# Altium PCB RearPlate.PcbDoc
Units mm, origin at the board's own origin, x right, y up, seen from the top; angles counter-clockwise.
Board outline 84 x 28.5 mm, 2 copper layers (Top Layer, Bottom Layer), stack 0.971 mm thick; 1 components, 1 nets, 7 pads, 0 vias.
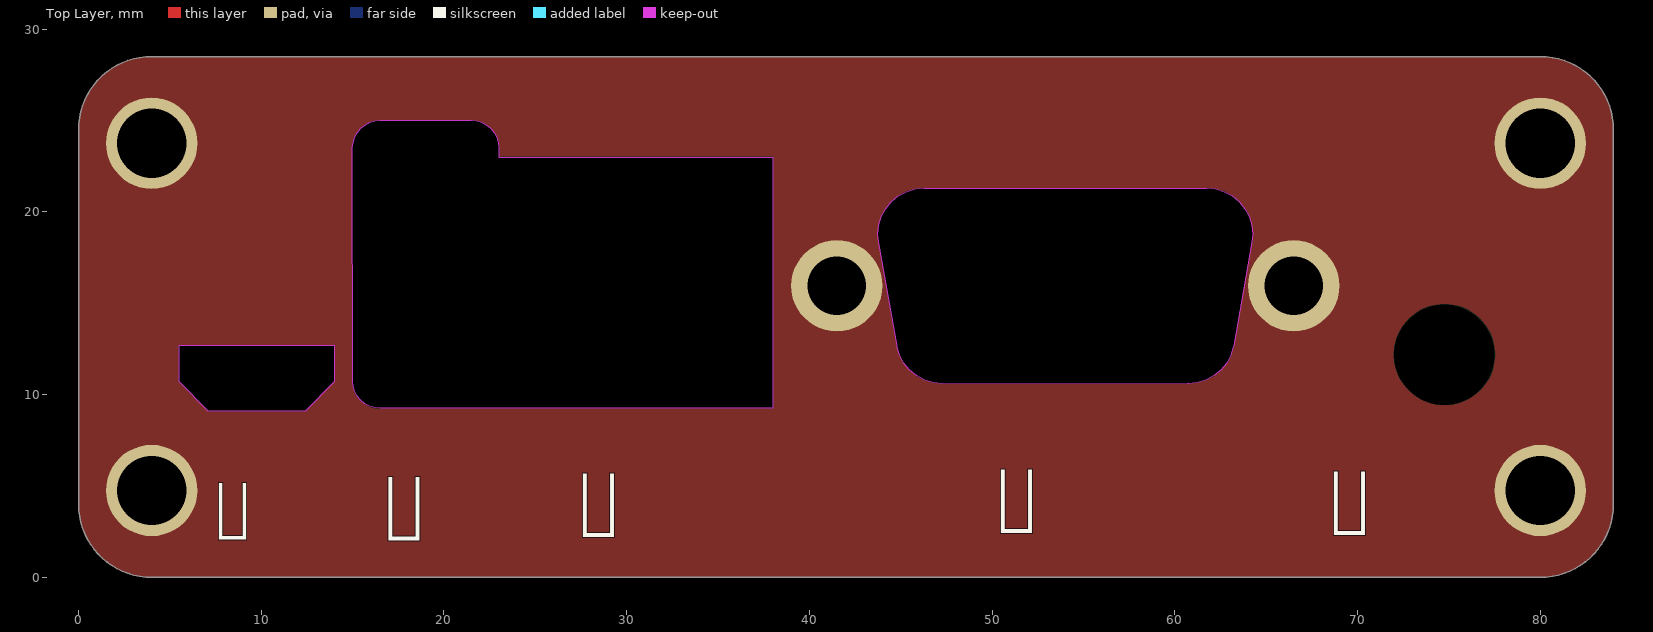
[diagram p0: Top Layer view]
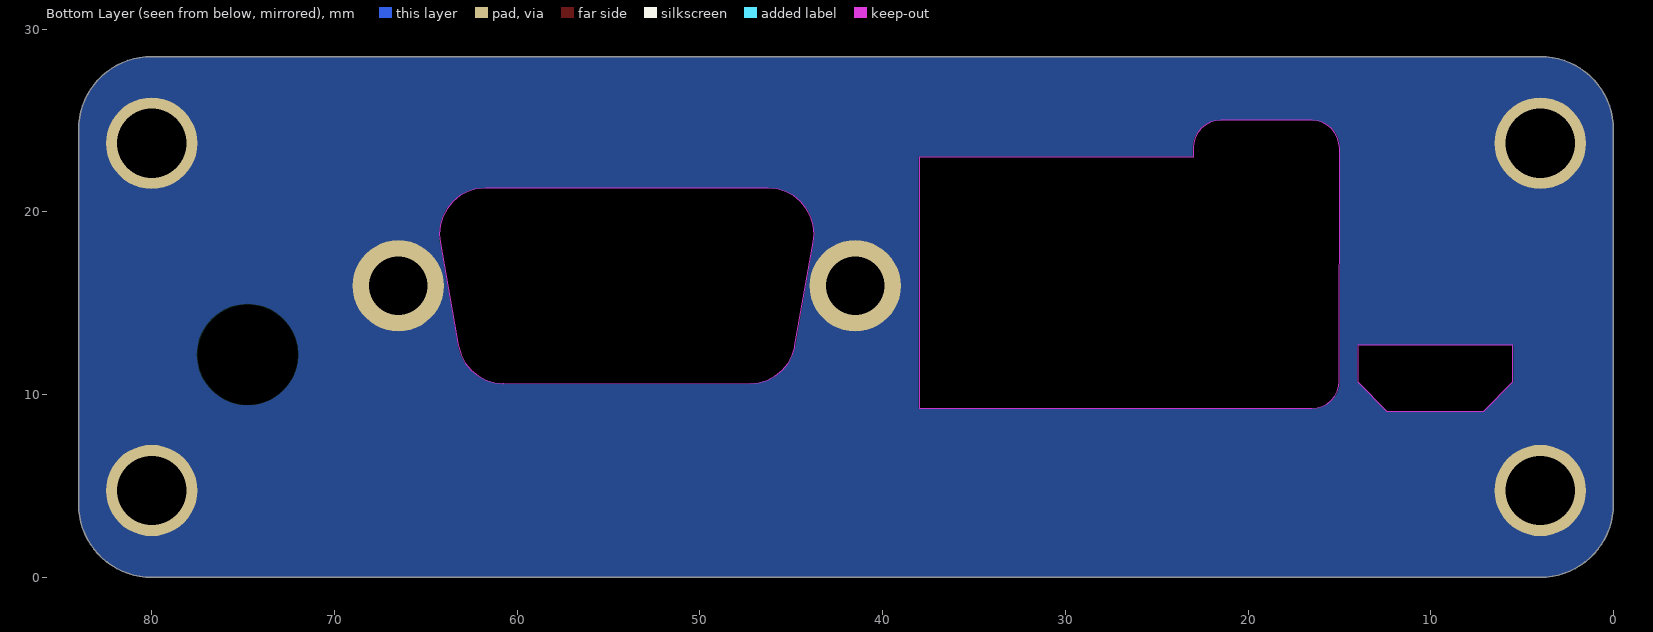
[diagram p1: Bottom Layer view, seen from below]

## Layer stack, top to bottom
Top Solder: solder mask 0.0254, Solder Resist, Dk 3.5
Top Layer: signal copper 0.0356
Dielectric 1: core 0.9, FR-4, Dk 4.6
Bottom Layer: signal copper 0.0356
Bottom Solder: solder mask 0.0254, Solder Resist, Dk 3.5

## Board outline
4,0 cw(c4,4) 0,4 0,24.5 cw(c4,24.5) 4,28.5 8.75,28.5 75.25,28.5 80,28.5 cw(c80,24.5) 84,24.5 84,4 cw(c80,4) 80,0 75.25,0 8.75,0
cut-out: 14,10.7 12.4,9.1 7.1,9.1 5.5,10.7 5.5,12.7 14,12.7
cut-out: 21.794,24.978 22.077,24.893 22.337,24.753 22.566,24.566 22.753,24.337 22.893,24.077 22.978,23.794 23.007,23.507 23,23.5 23,23 38,23 38,9.25 16.5,9.243 16.206,9.272 15.923,9.357 15.663,9.497 15.434,9.684 15.247,9.913 15.107,10.173 15.022,10.456 14.993,10.743 15,10.75 14.993,23.5 15.022,23.794 15.107,24.077 15.247,24.337 15.434,24.566 15.663,24.753 15.923,24.893 16.206,24.978 16.493,25.007 16.5,25 21.5,25.007
cut-out: 62.222,21.254 62.695,21.11 63.131,20.877 63.513,20.563 63.827,20.181 64.06,19.745 64.204,19.272 64.252,18.78 64.21,18.35 64.202,18.344 63.209,12.683 63.204,12.628 63.06,12.155 62.827,11.719 62.513,11.337 62.131,11.023 61.695,10.79 61.222,10.646 60.742,10.599 60.73,10.61 47.27,10.598 46.778,10.646 46.305,10.79 45.869,11.023 45.487,11.337 45.173,11.719 44.94,12.155 44.817,12.559 44.798,12.684 43.791,18.343 43.748,18.78 43.796,19.272 43.94,19.745 44.173,20.181 44.487,20.563 44.869,20.877 45.305,21.11 45.778,21.254 46.258,21.301 46.27,21.29 61.73,21.302

## Design rules (kind name [scope] priority, off if disabled: settings)
AssemblyTestPointUsage AssemblyTestPointUsage_1 [All] p2:
AssemblyTestpoint AssemblyTestpoint_1 [All] p2: testpointundercomponent=TRUE minsize=1.016 maxsize=2.54 preferedsize=1.524 minholesize=0 maxholesize=1.016 preferedholesize=0.813 testpointgrid=0.025 usegrid=TRUE gridtolerance=0 allowsidetop=TRUE allowsidebottom=TRUE
Clearance [All] p1: gap=0.254 ignorepadtopadclearanceinfootprint=FALSE
Clearance Clearance_1 [All] p2: gap=0.01 ignorepadtopadclearanceinfootprint=FALSE
ComponentClearance ComponentClearance_1 [All] p2: gap=0.254 collisioncheckmode=3 verticalgap=0.254 showdistances=FALSE
DiffPairsRouting DiffPairsRouting_1 [All] p2: maxlimit=0.254 minlimit=0.254 mostfreqgap=0.254 toplayer_minwidth=0.381 toplayer_maxwidth=0.381 toplayer_prefwidth=0.381 bottomlayer_minwidth=0.381 bottomlayer_maxwidth=0.381 bottomlayer_prefwidth=0.381 maxuncoupledlength=12.7
FabricationTestPointUsage FabricationTestPointUsage_1 [All] p2: valid=0 allowmultiple=FALSE
FabricationTestpoint FabricationTestpoint_1 [All] p2: side=3 testpointundercomponent=TRUE minsize=1.016 maxsize=2.54 preferedsize=1.524 minholesize=0 maxholesize=1.016 preferedholesize=0.813 testpointgrid=0.025 allowsidetop=TRUE allowsidebottom=TRUE usegrid=TRUE gridtolerance=0
FanoutControl Fanout_LCC [IsLCC] p1: bgadir=Out bgaviamode=Centered fanoutstyle=Auto fanoutdirection=Alternating viagrid=0.025 // Fanout_LCC (Default Rule)
FanoutControl Fanout_BGA [IsBGA] p2: bgadir=Out bgaviamode=Centered fanoutstyle=Auto fanoutdirection=Alternating viagrid=0.025 // Fanout_BGA (Default Rule)
FanoutControl Fanout_Default [All] p4: bgadir=Out bgaviamode=Centered fanoutstyle=Auto fanoutdirection=Alternating viagrid=0.025 // Fanout_Default (Default Rule)
FanoutControl Fanout_Small [(CompPinCount < 5)] p5: bgadir=Out bgaviamode=Centered fanoutstyle=Auto fanoutdirection=OutThenIn viagrid=0.025 // Fanout_Small (Default Rule)
FanoutControl Fanout_BGA_1 [IsBGA] p6: bgadir=Out bgaviamode=Centered fanoutstyle=Auto fanoutdirection=Alternating viagrid=0.025 // Fanout_BGA (Default Rule)
FanoutControl Fanout_LCC_1 [IsLCC] p7: bgadir=Out bgaviamode=Centered fanoutstyle=Auto fanoutdirection=Alternating viagrid=0.025 // Fanout_LCC (Default Rule)
FanoutControl Fanout_SOIC_1 [IsSOIC] p8: bgadir=Out bgaviamode=Centered fanoutstyle=Auto fanoutdirection=Alternating viagrid=0.025 // Fanout_SOIC (Default Rule)
FanoutControl Fanout_Small_1 [(CompPinCount < 5)] p9: bgadir=Out bgaviamode=Centered fanoutstyle=Auto fanoutdirection=OutThenIn viagrid=0.025 // Fanout_Small (Default Rule)
FanoutControl Fanout_Default_1 [All] p10: bgadir=Out bgaviamode=Centered fanoutstyle=Auto fanoutdirection=Alternating viagrid=0.025 // Fanout_Default (Default Rule)
Height Height_1 [All] p2: minheight=0 maxheight=25.4 prefheight=12.7
HoleSize HoleSize_1 [All] p2: absolutevalues=TRUE maxlimit=2.54 minlimit=0.025 maxpercent=80.000 minpercent=20.000
HoleToHoleClearance HoleToHoleClearance_1 [All] p2: gap=0.254 allowstackedmicrovias=TRUE
LayerPairs LayerPairs_1 [All] p2: enforce=TRUE
MinimumSolderMaskSliver MinimumSolderMaskSliver_1 [All] p2: minsoldermaskwidth=0.254
NetAntennae NetAntennae_1 [All] p2: netantennaetolerance=0
PasteMaskExpansion PasteMaskExpansion_1 [All] p2: expansion=0
PlaneClearance PlaneClearance_1 [All] p2: clearance=0.508
PlaneConnect PlaneConnect_1 [All] p2: planeconnectstyle=Relief reliefexpansion=0.508 reliefentries=4 reliefconductorwidth=0.254 reliefairgap=0.254
PolygonConnect [All] p1: connectstyle=Relief reliefconductorwidth=0.254 reliefentries=4 polygonreliefangle="90 Angle" airgapwidth=0.254
PolygonConnect PolygonConnect_1 [All] p2: connectstyle=Direct reliefconductorwidth=0.254 reliefentries=4 polygonreliefangle="90 Angle" airgapwidth=0.254
RoutingCorners RoutingCorners_1 [All] p2: cornerstyle=45-Degree minsetback=2.54 maxsetback=2.54
RoutingLayers RoutingLayers_1 [All] p2: top layer_v5=TRUE bottom layer_v5=TRUE
RoutingPriority RoutingPriority_1 [All] p2: routingpriority=0
RoutingTopology RoutingTopology_1 [All] p2: topology=Shortest
RoutingVias [All] p1: holewidth=0.711 width=1.27 viastyle="Through Hole" minholewidth=0.711 minwidth=1.27 maxholewidth=0.711 maxwidth=1.27
RoutingVias RoutingVias_1 [All] p2: holewidth=0.711 width=1.27 viastyle="Through Hole" minholewidth=0.711 minwidth=1.27 maxholewidth=0.711 maxwidth=1.27
ShortCircuit ShortCircuit_1 [All] p2: allowed=FALSE
SilkToBoardRegionClearance SilkToBoardRegionClearance_1 [All] p2:
SilkToSilkClearance SilkToSilkClearance_1 [All] p2: silktosilkclearance=0.254
SilkToSolderMaskClearance SilkToSolderMaskClearance_1 [IsPad] p2: minsilkscreentomaskgap=0.254 clearancetoexposedcopper=TRUE
SolderMaskExpansion [All] p1: expansion=0.102 istentingtop=FALSE
SolderMaskExpansion SolderMaskExpansion_1 [All] p2: expansion=0.102 istentingtop=FALSE
UnRoutedNet UnRoutedNet_1 [All] p2:
UnpouredPolygon UnpouredPolygon_1 [All] p2:
Width [All] p1: maxlimit=0.254 minlimit=0.254 preferedwidth=0.254
Width Width_1 [All] p2: maxlimit=0.254 minlimit=0.254 preferedwidth=0.254
26 further rules are at their usual default settings.

## Components (designator, comment, footprint, x,y, rotation, side; value= is the part's Value field where it differs from the comment)
 "Comment" PCB-rupm4665jh793f2ljsg0-1 54,15.95 r0 top

## Footprints (in the part's own frame and the unit in brackets; to place one, negate y for a bottom-side part, rotate by r counter-clockwise, add the part's x,y. Pads: shape width x height; smd on the part's side, far side on the other; paste and mask are expansions set on the pad)
PCB-rupm4665jh793f2ljsg0-1 [mm]
  round 5 hole 3.2: 1(-12.5,0) 2(12.5,0)

## Part data
: library part "DE panelmount-1"

## Free pads (board coordinates)
  round 1.524 hole 5.5 unplated: 0(74.75,12.19)
  round 5 hole 3.8: 1(4,23.75) 1(80,23.75) 2(4,4.75) 2(80,4.75)

## Nets (pads, with @x,y where several pads share a name; then routed paths per layer and width w, separated by ;. In a path a pad name is that pad's centre, name@x,y a point inside that pad or via, vN(x,y) a via of type N, cw(c..) or ccw(c..) an arc to the next point about the centre after c; other vN are vias at no path point)
GND: pad.1 pad.2 .1 .2

## Polygon pours and split planes (outlines as drawn)
GND on Top Layer "Mechanical 3-No Net" (solid, pour order 5): 4,0 cw(c4,4) 0,4 0,24.5 cw(c4,24.5) 4,28.5 8.75,28.5 75.25,28.5 80,28.5 cw(c80,24.5) 84,24.5 84,4 cw(c80,4) 80,0 75.25,0 8.75,0
GND on Bottom Layer "Mechanical 3-No Net" (solid, pour order 4): 4,0 cw(c4,4) 0,4 0,24.5 cw(c4,24.5) 4,28.5 8.75,28.5 75.25,28.5 80,28.5 cw(c80,24.5) 84,24.5 84,4 cw(c80,4) 80,0 75.25,0 8.75,0
GND on Bottom Solder "Mechanical 3-No Net" (solid, pour order 6): 4,0 cw(c4,4) 0,4 0,24.5 cw(c4,24.5) 4,28.5 8.75,28.5 75.25,28.5 80,28.5 cw(c80,24.5) 84,24.5 84,4 cw(c80,4) 80,0 75.25,0 8.75,0

## Silkscreen, mask and mechanical layers (free items; w line width, h text height)
Top Overlay:
  text "" at 68.5,0.8 h8
  text "" at 7.5,0.75 h7
  text "" at 27.4,0.7 h8
  text "" at 16.75,0.5 h8
Mechanical 3:
  lines w0.254: 0,4 ccw(c4,4) 4,0 8.75,0 75.25,0 80,0 ccw(c80,4) 84,4 84,24.5 ccw(c80,24.5) 80,28.5 75.25,28.5 8.75,28.5 4,28.5 ccw(c4,24.5) 0,24.5 0,4 ; 5.5,10.7 5.5,12.7 14,12.7 14,10.7 12.4,9.1 7.1,9.1 5.5,10.7 ; 15,10.75 ccw(c16.5,10.75) 16.5,9.25 38,9.25 38,23 23,23 23,23.5 ccw(c21.5,23.5) 21.5,25 16.5,25 ccw(c16.5,23.5) 15,23.5 15,10.75
Assembly Top:
  lines w0.254: 8.75,0 4,0 cw(c4,4) 0,4 0,24.5 cw(c4,24.5) 4,28.5 8.75,28.5 ; 9.25,0.75 42,0.75 74.75,0.75 ; 9.25,27.75 42,27.75 74.75,27.75 ; 75.25,0 80,0 ccw(c80,4) 84,4 84,24.5 ccw(c80,24.5) 80,28.5 75.25,28.5